# Altium PCB PCB2.PcbDoc
Units mil, origin at the board's own origin, x right, y up, seen from the top; angles counter-clockwise.
Board outline 6690 x 7065 mil, 2 copper layers (Top Layer, Bottom Layer); 29 components, 82 nets, 207 pads, 0 vias.
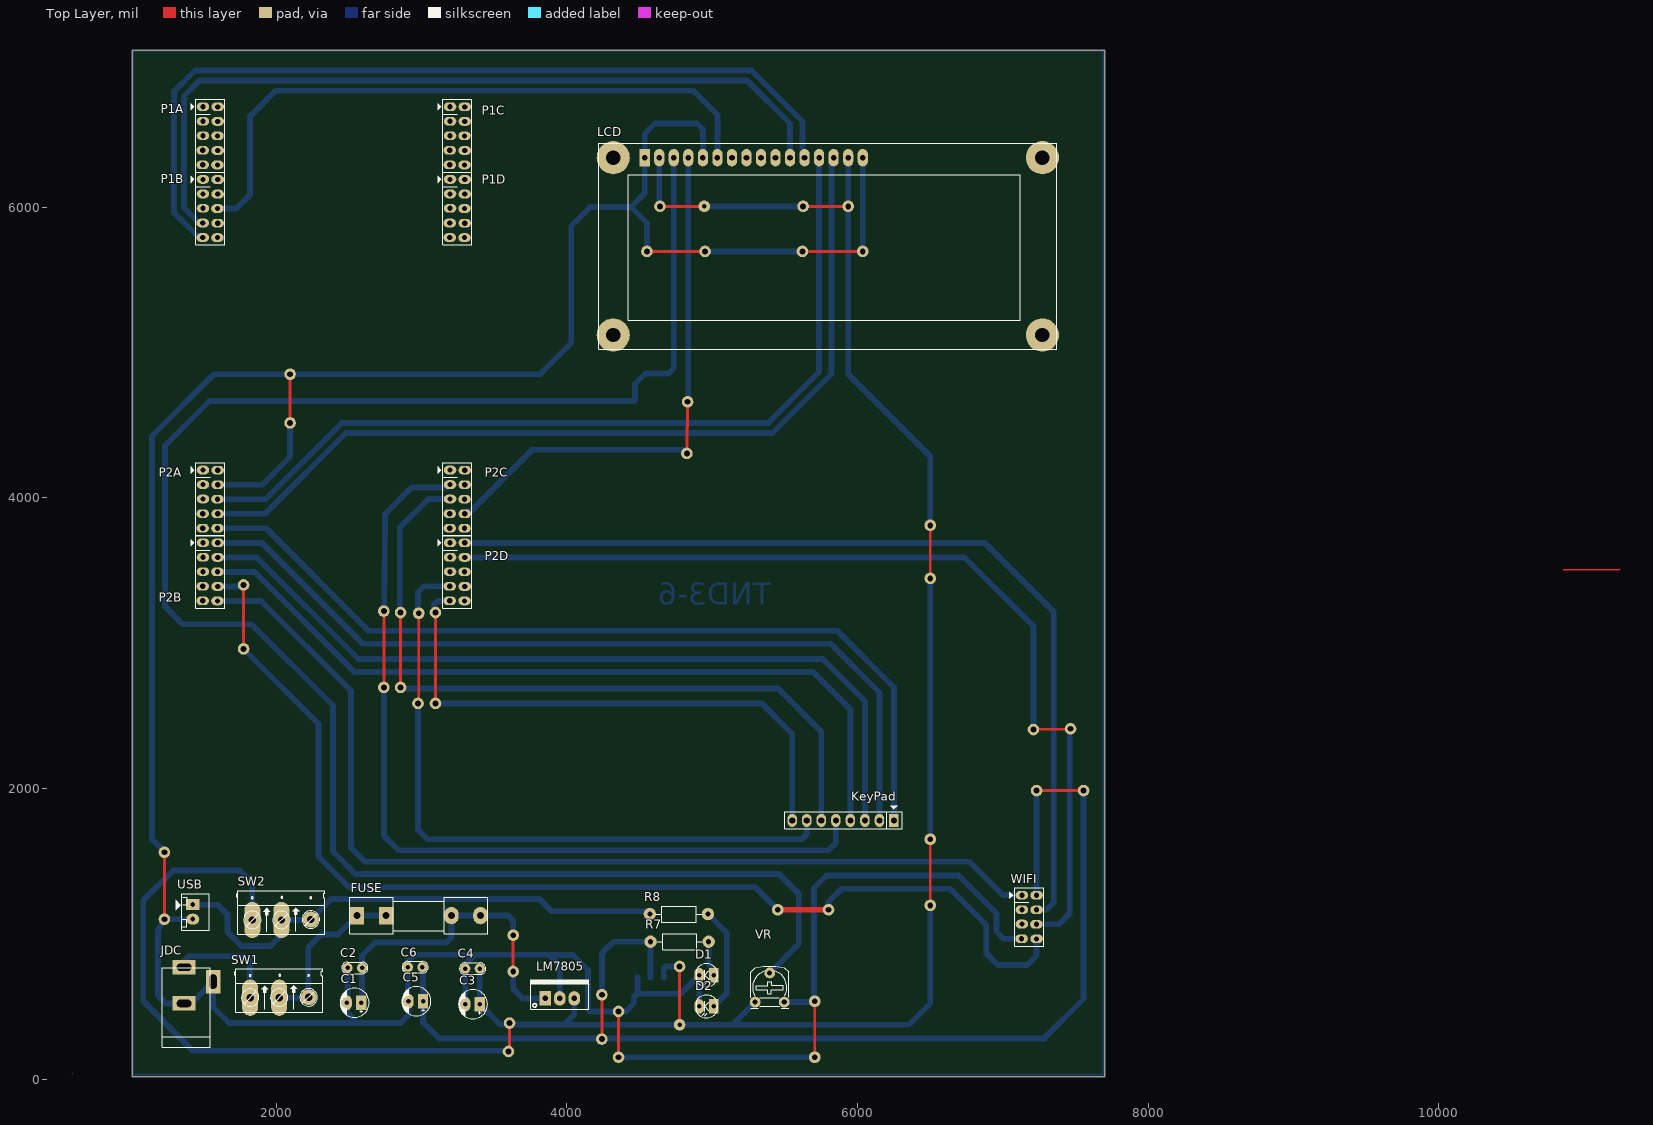
[diagram p0: Top Layer view]
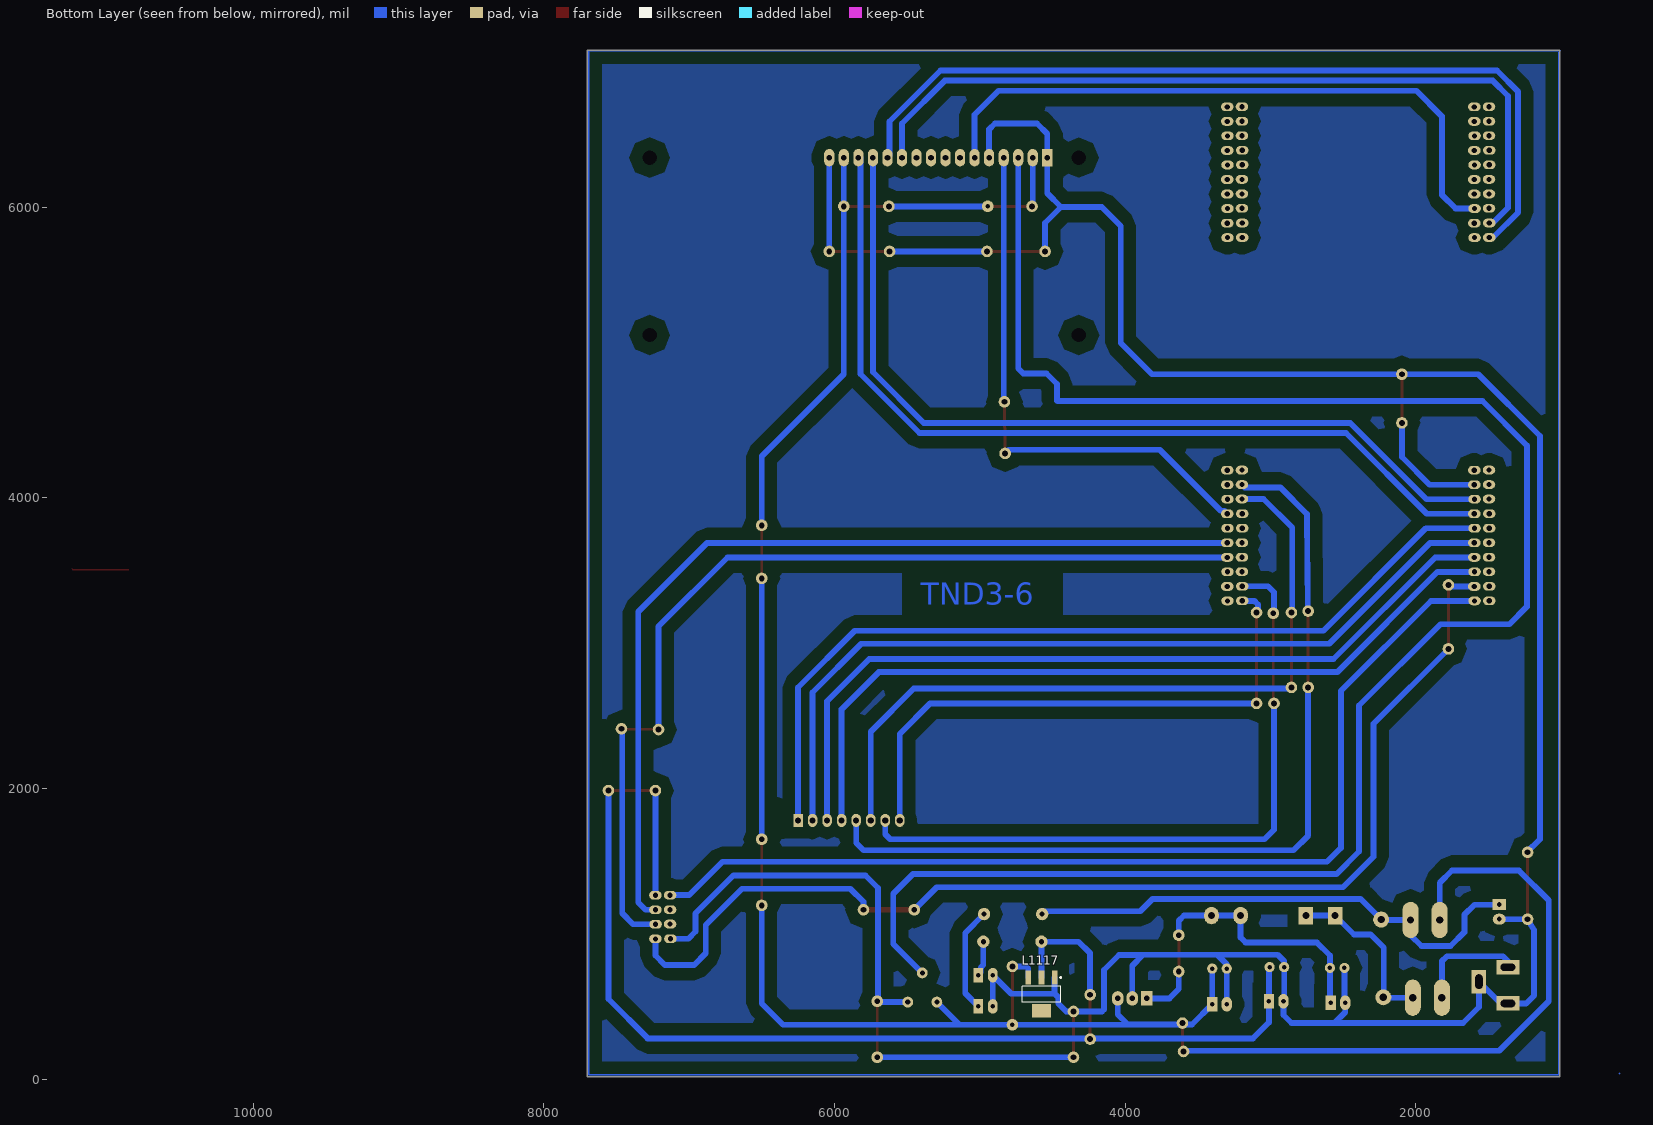
[diagram p1: Bottom Layer view, seen from below]
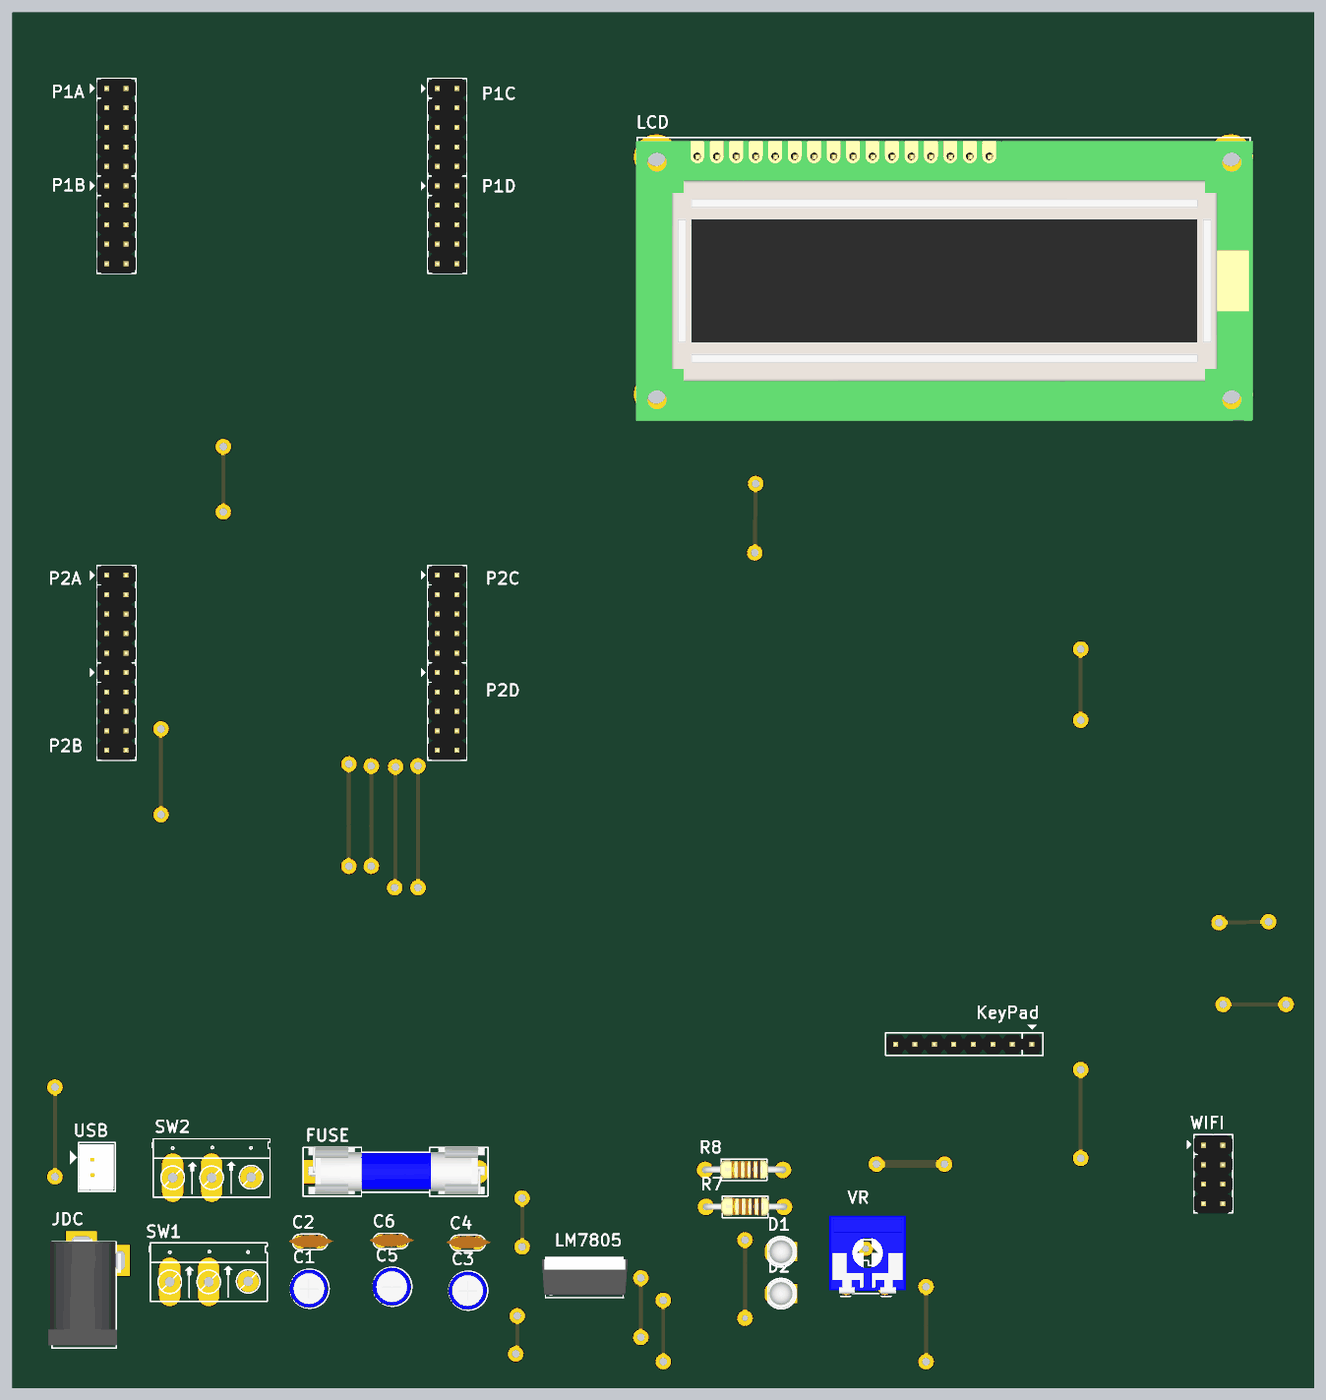
[diagram p2: 3D render of the assembled board from above, using the file's embedded part models]

## Layer stack, top to bottom
Top Solder: solder mask 0.4, Solder Resist, Dk 3.5
Top Layer: signal copper 1.4
Dielectric 1: dielectric 12.6, FR-4, Dk 4.8
Bottom Layer: signal copper 1.4
Bottom Solder: solder mask 0.4, Solder Resist, Dk 3.5

## Board outline
1010,15 7700,15 7700,7080 1010,7080

## Design rules (kind name [scope] priority, off if disabled: settings)
Clearance [All] p1: gap=80
PlaneClearance [All] p1: clearance=40
PlaneConnect [All] p1: planeconnectstyle=Relief reliefexpansion=40 reliefentries=4 reliefconductorwidth=20 reliefairgap=20
PolygonConnect [All] p1: connectstyle=Relief reliefconductorwidth=40 reliefentries=4 polygonreliefangle="90 Angle" airgapwidth=40
RoomDefinition Schematic [InComponentClass('Schematic')] p1: confinementstyle=ConfineIn formatcopy=TRUE lockcomponents=FALSE outline 10500,1230 20070,1230 20070,4530 10500,4530
RoutingVias [All] p1: holewidth=28 width=50 viastyle="Through Hole" minholewidth=28 minwidth=50 maxholewidth=28 maxwidth=50
SolderMaskExpansion [All] p1: expansion=4
Width [All] p1: maxlimit=40 minlimit=12 preferedwidth=20
28 further rules are at their usual default settings.

## Components (designator, comment, footprint, x,y, rotation, side; value= is the part's Value field where it differs from the comment)
C1 "Cap Pol" CP1/2 2585,525 r180 top
C2 "Cap Non-Pol" CN1 2490,765 r0 top
C3 "Cap Pol" CP1/2 3400,515 r180 top
C4 "Cap Non-Pol" CN1 3300,760 r0 top
C5 "Cap Pol" CP1/2 3010,535 r180 top
C6 "Cap Non-Pol" CN1 2905,770 r0 top
D1 "LED" LED-3mm 5010,715 r180 top
D2 "LED" LED-3mm 5010,500 r180 top
FUSE "Fuse" FUSE 2980,1125 r0 top
JDC "Jack DC" DC-IN 1465,645 r90 top
KeyPad "Header 8" JP8 6250,1780 r180 top
L1117 "LM1117" SOT223-4N 4575,585 r270 bottom
LCD "" LCD16X2 4535,6340 r0 top
LM7805 "LM7805" QTO-220 3850,555 r0 top
P1A "Header 5X2" JP5X2 1495,6690 r270 top
P1B "Header 5X2" JP5X2 1495,6190 r270 top
P1C "Header 5X2" JP5X2 3195,6690 r270 top
P1D "Header 5X2" JP5X2 3195,6190 r270 top
P2A "Header 5X2" JP5X2 1495,4190 r270 top
P2B "Header 5X2" JP5X2 1495,3690 r270 top
P2C "Header 5X2" JP5X2 3195,4190 r270 top
P2D "Header 5X2" JP5X2 3195,3690 r270 top
R7 "RESISTOR" "RES 1/2W" 4575,945 r0 top
R8 "RESISTOR" "RES 1/2W" 4570,1135 r0 top
SW1 "" HED3 1820,560 r0 top
SW2 "" HED3 1835,1095 r0 top
USB "" Header2 1425,1200 r270 top
VR "10K" VR 5295,530 r0 top
WIFI "Header 4X2" JP4x2 7180,1115 r270 top

## Footprints (in the part's own frame and the unit in brackets; to place one, negate y for a bottom-side part, rotate by r counter-clockwise, add the part's x,y. Pads: shape width x height; smd on the part's side, far side on the other; paste and mask are expansions set on the pad)
CN1 [mil]
  round 70 hole 31: 1(0,0) 2(100,0)
  silkscreen extent -40,-40 141,40, body extent -60,-30 170,37, height 265
CP1/2 [mil] "Tu hoa < 22uF/16>50V"
  rect 70x100 hole 32: 1(0,0)
  oval 70x100 hole 32: 2(100,0)
  silkscreen extent -53,-100 147,100, body extent -49,-99 149,99, height 287
DC-IN [mil] "Jac DC input"
  rect 100x160 hole 50 slot 100 at 90 deg: 1(125,100) 2(-125,100)
  rect 160x100 hole 50 slot 100 at 0 deg: 3(25,-100)
  silkscreen extent -425,-80 120,250, body extent -410,-105 134,269, height 434
FUSE [mil] "De Fuse"
  rect 100x120 hole 50: 1(-425,0) 1(-225,0)
  oval 100x120 hole 50: 2(225,0) 2(425,0)
  silkscreen extent -475,-125 475,125, body extent -448,-117 459,127, height 378
Header2 [mil] "CON2"
  rect 75x90 hole 34: 1(0,0)
  oval 75x90 hole 34: 2(100,0)
  silkscreen extent -75,-118 175,115, body extent -68,-70 168,107, height 236
HED3 [mil] "Header 3, 3 pin, hight 300mil, Pin to Pin 200, Colour Green"
  oval 110x250 hole 50: 1(0,0) 2(200,0)
  round 110 hole 50: 3(402.62,2.62)
  silkscreen extent -106,-100 500,200
JP4x2 [mil] "Connector 4x2"
  oval 60x86 hole 36: 1(-150.5,-49.5) 2(-50.5,-49.5) 3(48.5,-49.5) 4(149.5,-51.5) 5(-149.5,51.5) 6(-49.5,51.5) 7(50,50) 8(150.5,51.5)
  silkscreen extent -201,-135 201,101, body extent -197,-100 203,100, height 335
JP5X2 [mil]
  oval 60x86 hole 36: 1(-0.5,0.5) 2(99.5,0.5) 3(198.5,0.5) 4(299.5,-1.5) 5(399.5,-1.5) 6(0.5,101.5) 7(100.5,101.5) 8(200,100) 9(300.5,101.5) 10(400,100)
  silkscreen extent -51,-85 450,151, body extent -50,-50 450,150, height 335
JP8 [mil] "JP8"
  rect 65x90 hole 42: 1(0,0)
  oval 65x90 hole 42: 2(100,0) 3(200,0) 4(300,0) 5(400,0) 6(500,0) 7(600,0) 8(700,0)
  silkscreen extent -56,-100 752,57, body extent -48,-50 748,48, height 323
LCD16X2 [mm] "LCD dipslay 16x2, 16 pin"
  rect 1.778x3.048 hole 1: 1(0,0)
  oval 1.778x3.048 hole 1: 2(2.54,0) 3(5.08,0) 4(7.62,0) 5(10.16,0) 6(12.7,0) 7(15.24,0) 8(17.78,0) 9(20.32,0) 10(22.86,0) 11(25.4,0) 12(27.94,0) 13(30.48,0) 14(33.02,0) 15(35.56,0) 16(38.1,0)
  round 5.8 / inner round 0 / far side round 0 hole 2.5 unplated: M1(-5.5,0) M2(69.5,0) M3(-5.5,-31) M4(69.5,-31)
  silkscreen extent -8,-33.5 72,2.5, body extent -8.13,-34.47 72.37,2.03, height 18.14
LED-3mm [mil] "LED 2 PIN, 3ly Only colour"
  rect 65x100 hole 32: 1(0,0)
  oval 65x100 hole 32: 2(100,0)
  silkscreen extent -29,-78 118,79, body extent -25,-75 113,75, height 217
QTO-220 [mil] "TO-220 - 1-2-3"
  rect 80x100 hole 39: 1(0,0)
  oval 80x100 hole 39: 2(100,0) 3(200,0)
  silkscreen extent -100,-76 300,130, body extent -119,-64 322,121, height 755
"RES 1/2W" [mil] "R 1/2W, 2 pin, 300mil"
  round 85 hole 35: 1(0,0) 2(400,0)
  silkscreen extent 42,-55 356,55, body extent -12,-45 414,49, height 91
SOT223-4N [mm] "SOT223, 4-Leads, Body 6.5x3.5mm, Pitch 2.3mm, Lead Span 7mm, IPC Medium Density"
  rect 2.4x1 smd: 1(-2.9,2.3) 2(-2.9,0) 3(-2.9,-2.3)
  rect 2.4x3.3 smd: 4(2.9,0)
  silkscreen extent -3.02,-3.35 1.4,3.47, body extent -3.39,-3.27 3.5,3.23, height 1.72
VR [mil] "Resistor Variable"
  round 75 hole 35: 1(0,0) 2(100,200) 3(200,0)
  silkscreen extent -31,-44 231,246, body extent -87,-30 307,372, height 165

## Part data
C1 C3 C5: "Polarized Capacitor (Radial)"
C2 C4 C6: "Capacitor"
JDC: "Jack DC input"
KeyPad: "Header, 8-Pin"
L1117: "Available in 1.8V, 2.5V, 2.85V, 3.3V, 5V, and  Adjustable Versions"
LCD: library part LCD16x2A, "LCD dipslay 16 char, 2 line"
LM7805: "Positive Voltage Regulator"
P1A P1B P1C P1D P2A P2B P2C P2D: "Header, 5-Pin, Dual row"
R7 R8: "Resistor"
SW1 SW2: library part Hed3, "Header 3 (Green)"
USB: library part Header2, "Header IDC, 2 x 1 Pin Vertical 2.54mm Pitch (Non-Boxed, Male)"
VR: library part VR-S, "Var Resistor"
WIFI: "Header, 4-Pin, Dual row"

## Free pads (board coordinates)
  round 80 hole 40: 66(4825,4305) 67(4830,4660) 70(2855,3210) 71(2740,3220) 72(2855,2695) 73(2740,2695) 74(2980,3205) 75(3095,3210) 77(3095,2585) 78(7465,2410) 79(7210,2405) 80(7231.5,1985) 81(7555,1985) 82(1775,3400) 83(1775,2960) 84(5450,1165) 85(5800,1165) 88(6500,3810) 89(6500,3445) 90(6500,1650) 91(6500,1195) 92(4775,775) 94(4240,580) 95(4240,275) 96(3597.5,190) 97(3605,385) 98(3630,990) 99(3630,740) 100(2095,4515) 101(2095,4850) 102(6035,5695) 103(5620,5695) 104(4950,5695) 105(4550,5695) 106(4640,6005) 110(5625,6005) 111(5935,6005) 112(1230,1560) 113(1230,1100) 114(4355,465) 115(4355,150) 116(5705,535) 117(5705,150)
  round 80 hole 40 paste+0: 76(2975,2585)
  round 80 hole 30: 93(4775,373.58) 109(4945,6005)

## Nets (pads, with @x,y where several pads share a name; then routed paths per layer and width w, separated by ;. In a path a pad name is that pad's centre, name@x,y a point inside that pad or via, vN(x,y) a via of type N, cw(c..) or ccw(c..) an arc to the next point about the centre after c; other vN are vias at no path point)
+3V3: C5.1 C6.2 L1117.2 pad.80 pad.81 pad.94 pad.95 R7.1 WIFI.5 | length 8780.9
  Top Layer w20: pad.95 pad.94 ; pad.80 pad.81
  Bottom Layer w40: C6.2 3010,765 C5.1 3010,390 3120,280 7285,280 7555,550 pad.81 ; pad.94 4240,865 4320,945 R7.1 L1117.2 ; WIFI.5 pad.80 pad.80@7231.5,1998.5
+5V: C3.1 C4.2 L1117.3 LCD.2 LCD.15 LM7805.3 pad.88 pad.89 pad.90 pad.91 pad.92 pad.93 pad.96 pad.97 pad.106 pad.109 pad.110 pad.111 SW2.1 VR.1 | length 16795.7
  Top Layer w20: pad.96@3605,197.5 pad.97 ; pad.106 pad.109 ; pad.93 pad.92 ; pad.110 pad.111 ; pad.91 pad.90 ; pad.89 pad.88
  Bottom Layer w40: SW2.1 1835,1350 1750,1435 1290,1435 1085,1230 1085,535 1425,195 3595,195 pad.96 ; C4.2 C3.1 3540,375 3980,375 ; LM7805.3 4050,445 3980,375 ; pad.106@4635,6015 LCD.2 ; L1117.3 4665.55,760.55 4680,775 pad.92 ; pad.109 pad.110@5610,6005 ; VR.1 5138.58,373.58 ; LCD.15 pad.111 5935,4850 6500,4285 pad.88 ; pad.91 6500,520 6353.58,373.58 5138.58,373.58 ; pad.90 pad.89 ; 3980,375 3981.42,373.58 pad.93 5138.58,373.58
GND: C1.2 C2.1 C3.2 C4.1 C5.2 C6.1 D1.2 D2.2 JDC.2 JDC.3 L1117.1 LCD.1 LCD.5 LCD.16 LM7805.2 P2A.7 pad.100 pad.101 pad.102 pad.103 pad.104 pad.105 pad.112 pad.113 pad.114 pad.115 pad.116 pad.117 USB.2 VR.3 WIFI.4 | length 24395.8
  Top Layer w20: pad.113 pad.112 ; pad.100 pad.101 ; pad.115 pad.114 ; pad.105 pad.104 ; pad.103 pad.102 ; pad.117 pad.116
  Bottom Layer w40: pad.112@1235,1560 1145,1650 1145,4425 1570,4850 pad.101 3815,4850 4030,5065 4030,5870 4160,6000 4440,6000 ; USB.2 pad.113 1185,1025 1185,575 1240,520 JDC.2 1415,520 JDC.3 1565,495 1675,385 2560,385 ; P2A.7 1904.5,4089.5 2095,4280 pad.100 ; C1.2 2485,460 2560,385 ; C1.2@2490,530 C2.1 ; C5.2@2905,540 C6.1 2905,810 2950,855 3365,855 ; C5.2 2910,440 2855,385 2560,385 ; C3.2 C4.1 3300,790 3365,855 ; 3875,855 3365,855 ; LM7805.2 3950,780 3876.32,853.68 4041.32,853.68 4145,750 4145,478.58 4158.58,465 pad.114 4405,465 4460.04,520.04 4460.04,563.19 4484.45,587.6 ; pad.115 pad.117 ; L1117.1 4484.45,587.6 ; pad.105 4550,5890 4440,6000 ; D2.2 D1.2 4782.6,587.6 4484.45,587.6 ; LCD.5 4935,6535 4895,6575 4605,6575 4535,6505 LCD.1 4535,6095 4440,6000 ; pad.104 pad.103 ; VR.3 5690,530 5700,540 5700,1315 5785,1400 6695,1400 6955,1140 6955,1015 7004.5,965.5 WIFI.4 ; pad.102 LCD.16
NetC1_1: C1.1 C2.2 FUSE.2 LM7805.1 pad.98 pad.99 | length 2278.2
  Top Layer w20: pad.99 pad.98
  Bottom Layer w40: C1.1@2590,530 C2.2 2590,850 2680,940 3170,940 3205,975 3205,1125 3405,1125 3595,1125 3630,1090 pad.98@3630,1005 ; pad.99 3630,620 3695,555 LM7805.1
NetD1_1: D1.1 R7.2 | length 244.5
  Bottom Layer w40: R7.2 4975,784.17 4992.5,766.67 4992.5,732.5 D1.1
NetD2_1: D2.1 R8.2 | length 726.1
  Bottom Layer w40: R8.2 5100,1005 5100,590 D2.1
NetFUSE_1: FUSE.1 SW1.2 SW1.3 | length 1171.1
  Bottom Layer w40: SW1.2 2220,560 2220,905 2310,995 2425,995 2555,1125 FUSE.1@2755,1125
NetJDC_1: JDC.1 SW1.1 | length 774
  Bottom Layer w40: JDC.1 1365,810 1400,845 1785,845 1820,810 SW1.1
OUT: R8.1 SW2.2 SW2.3 USB.1 | length 3541
  Bottom Layer w40: USB.1 1595,1200 1665,1130 1665,1010 1760,915 1960,915 2035,990 SW2.2 SW2.3@2235,1095 ; SW2.3 2380,1240 3810,1240 3895,1155 R8.1@4550,1155
PA0+PD4: P2A.5
PA1+PD5: P2B.1
PA4: P2B.9 pad.82 pad.83 pad.84 pad.85 WIFI.8 | length 7899.4
  Top Layer w20: pad.83 pad.82
  Top Layer w40: pad.84 pad.85
  Bottom Layer w40: P2B.9 pad.82@1754.5,3389.5 ; pad.83 2290,2445 2290,1530 2500,1320 5295,1320 pad.84 ; pad.85 5800,1220 5890,1310 6635,1310 6885,1060 6885,865 6965,785 7166.5,785 7231.5,850 WIFI.8
PA5: P2B.10 WIFI.1 | length 7006.7
  Bottom Layer w40: P2B.10 1895,3290 2515,2670 2515,1590 2610,1495 6770,1495 6999.5,1265.5 WIFI.1
PA6: LCD.6 P1B.8 | length 4455.2
  Bottom Layer w40: P1B.8 1725,5990 1820,6085 1820,6625 1995,6800 4870,6800 5035,6635 LCD.6
PA7: LCD.4 P2C.9 pad.66 pad.67 | length 3765.5
  Top Layer w20: pad.66 pad.67
  Bottom Layer w40: P2C.9 3317,3910 3341.14,3910 3761.14,4330 4800,4330 pad.66@4835,4295 ; pad.67@4835,4665 LCD.4
PB2: LCD.11 P1B.4 | length 5488.8
  Bottom Layer w40: P1B.4@1470.36,5890.5 1365,5995.86 1365,6765 1470,6870 5240,6870 5535,6575 LCD.11
PB3: LCD.12 P1B.5 | length 5839.8
  Bottom Layer w40: P1B.5@1467.36,5790.5 1295,5962.86 1295,6793.99 1441.01,6940 5268.99,6940 5620,6588.99 LCD.12@5620,6355
PB4: LCD.13 P2A.8 | length 5977.4
  Bottom Layer w40: P2A.8 1925,3990 2450,4515 5385,4515 5735,4865 LCD.13
PB5: LCD.14 P2A.9 | length 6110.8
  Bottom Layer w40: P2A.9 1923.49,3889.5 2478.99,4445 5413.99,4445 5820,4851.01 LCD.14@5820,6340
PC4: P1A.3
PC5: P1A.4
PC6: P1A.5
PC7: P1B.3
PD0: P1D.7
PD1: P1D.6
PD2: P2A.2
PD3: P1B.2
PD7: P1B.7
PE0: P1A.8
PE1: P1A.9
PE2: P1A.10
PE3: P1B.6
PE4: P1A.2
PE5: P1B.1
PF1: P1C.1
PF2: P1C.2
PF3: P1C.3
PG0: P1C.4
PG1: P2C.1
PH0: P2D.2
PH1: P2D.3
PH2: P1C.8
PH3: P1C.9
PK0: KeyPad.1 P2A.10 | length 6023.6
  Bottom Layer w40: P2A.10 1930,3790 2635,3085 5860,3085 6250,2695 KeyPad.1
PK1: KeyPad.2 P2B.6 | length 5859.9
  Bottom Layer w40: P2B.6 1900.5,3689.5 2595,2995 5815,2995 6150,2660 KeyPad.2
PK2: KeyPad.3 P2B.7 | length 5683.4
  Bottom Layer w40: P2B.7 1865.5,3589.5 2565,2890 5760,2890 6050,2600 KeyPad.3
PK3: KeyPad.4 P2B.8 | length 5511.4
  Bottom Layer w40: P2B.8 1850,3490 2540,2800 5695,2800 5950,2545 KeyPad.4
PK4: KeyPad.5 P2C.2 pad.71 pad.73 | length 6084.9
  Top Layer w20: pad.73 pad.71
  Bottom Layer w40: pad.73@2733.55,2687.28 pad.73 2740,1675 2840,1575 5800,1575 5850,1625 KeyPad.5 ; pad.71@2750,3220 2744.16,3224.93 2743.7,3225.31 2742.98,3233.78 2747.09,3887.09 2931.5,4071.5 3176.5,4071.5 P2C.2
PK5: KeyPad.6 P2C.3 pad.70 pad.72 | length 5158.7
  Top Layer w20: pad.72 pad.70
  Bottom Layer w40: pad.72 2863.54,2686.56 5453.44,2686.56 5750,2390 KeyPad.6 ; pad.70 2850,3235 2850,3795 3046.5,3991.5 P2C.3
PK6: KeyPad.7 P2D.4 pad.74 pad.76 | length 4672.9
  Top Layer w20: pad.76@2980,2590 pad.74
  Bottom Layer w40: pad.76 2975,1715 3040,1650 5615,1650 5650,1685 KeyPad.7 ; pad.74@2990,3215 2975,3230 2975,3350 3015.5,3390.5 P2D.4
PK7: KeyPad.8 P2D.5 pad.75 pad.77 | length 3946
  Top Layer w20: pad.77 pad.75
  Bottom Layer w40: pad.75@3085,3200 3085,3265 3110.5,3290.5 P2D.5 ; pad.77 5340,2585 5550,2375 KeyPad.8
PL0: P1D.2
PL1: P1D.3
PL2: P1D.4
PL3: P1D.5
PL4: P1C.5
PL5: P1D.1
PM0: P2C.4
PM1: P2C.5
PM2: P2D.1
PM3: P1C.7
PM4: P1B.9
PM5: P1B.10
PM6: P2D.10
PM7: P2C.7
PN2: P1D.8
PN3: P1D.9
PN4: P2B.5
PN5: P2B.4
PP0: P2A.3
PP1: P2A.4
PP2: P1D.10
PP3: P2D.8
PP4: P2B.3
PP5: P2C.8
PQ0: P2B.2
PQ1: P2D.9
PQ2+PA3: P2D.6 WIFI.6 | length 6389.5
  Bottom Layer w40: P2D.6 6875.5,3689.5 7350,3215 7350,1215 7299.5,1164.5 WIFI.6
PQ3+PA2: P2D.7 pad.78 pad.79 WIFI.7 | length 6591.6
  Top Layer w20: pad.79 pad.78
  Bottom Layer w40: P2D.7 6735.5,3589.5 7210,3115 pad.79@7210,2420 ; WIFI.7 7385,1065 7460,1140 7460,2380 pad.78
RST1: P1C.10
RST2: P2C.10
VS: LCD.3 VR.2 | length 12738
  Bottom Layer w40: 4465,4665 1540,4665 1235,4360 1235,3250 1355,3130 1830,3130 2390,2570 2390,1565 2545,1410 5460,1410 5595,1275 5595,930 VR.2 ; 4467.5,4667.5 4467.5,4782.5 4540,4855 4700,4855 4735,4890 LCD.3
pads on no net: L1117.4 LCD.7 LCD.8 LCD.9 LCD.10 LCD.M1 LCD.M2 LCD.M3 LCD.M4 P1A.1 P1A.6 P1A.7 P1C.6 P2A.1 P2A.6 P2C.6 WIFI.2 WIFI.3
copper on no net: | length 27839.1
  Top Layer w10: 10855,3505 11240,3505 11245,3510
  Bottom Layer w10: 595,35 600,40 ; 1005,7075 7690,7075 7690,30 1015,30 1015,506.01 1015,7065

## Polygon pours and split planes (outlines as drawn)
no net on Bottom Layer "Bottom Solder-No Net" (solid, pour order 2): 1040,7055 7670,7055 7690,7075 7690,50 1060,50 1040,30

## Other copper
Bottom Layer:
  text "TND3-6" at 5405,3265 h150